# EAGLE board MagicQCtrlPadEncoderPCB v12 (EAGLE 9.7.0)
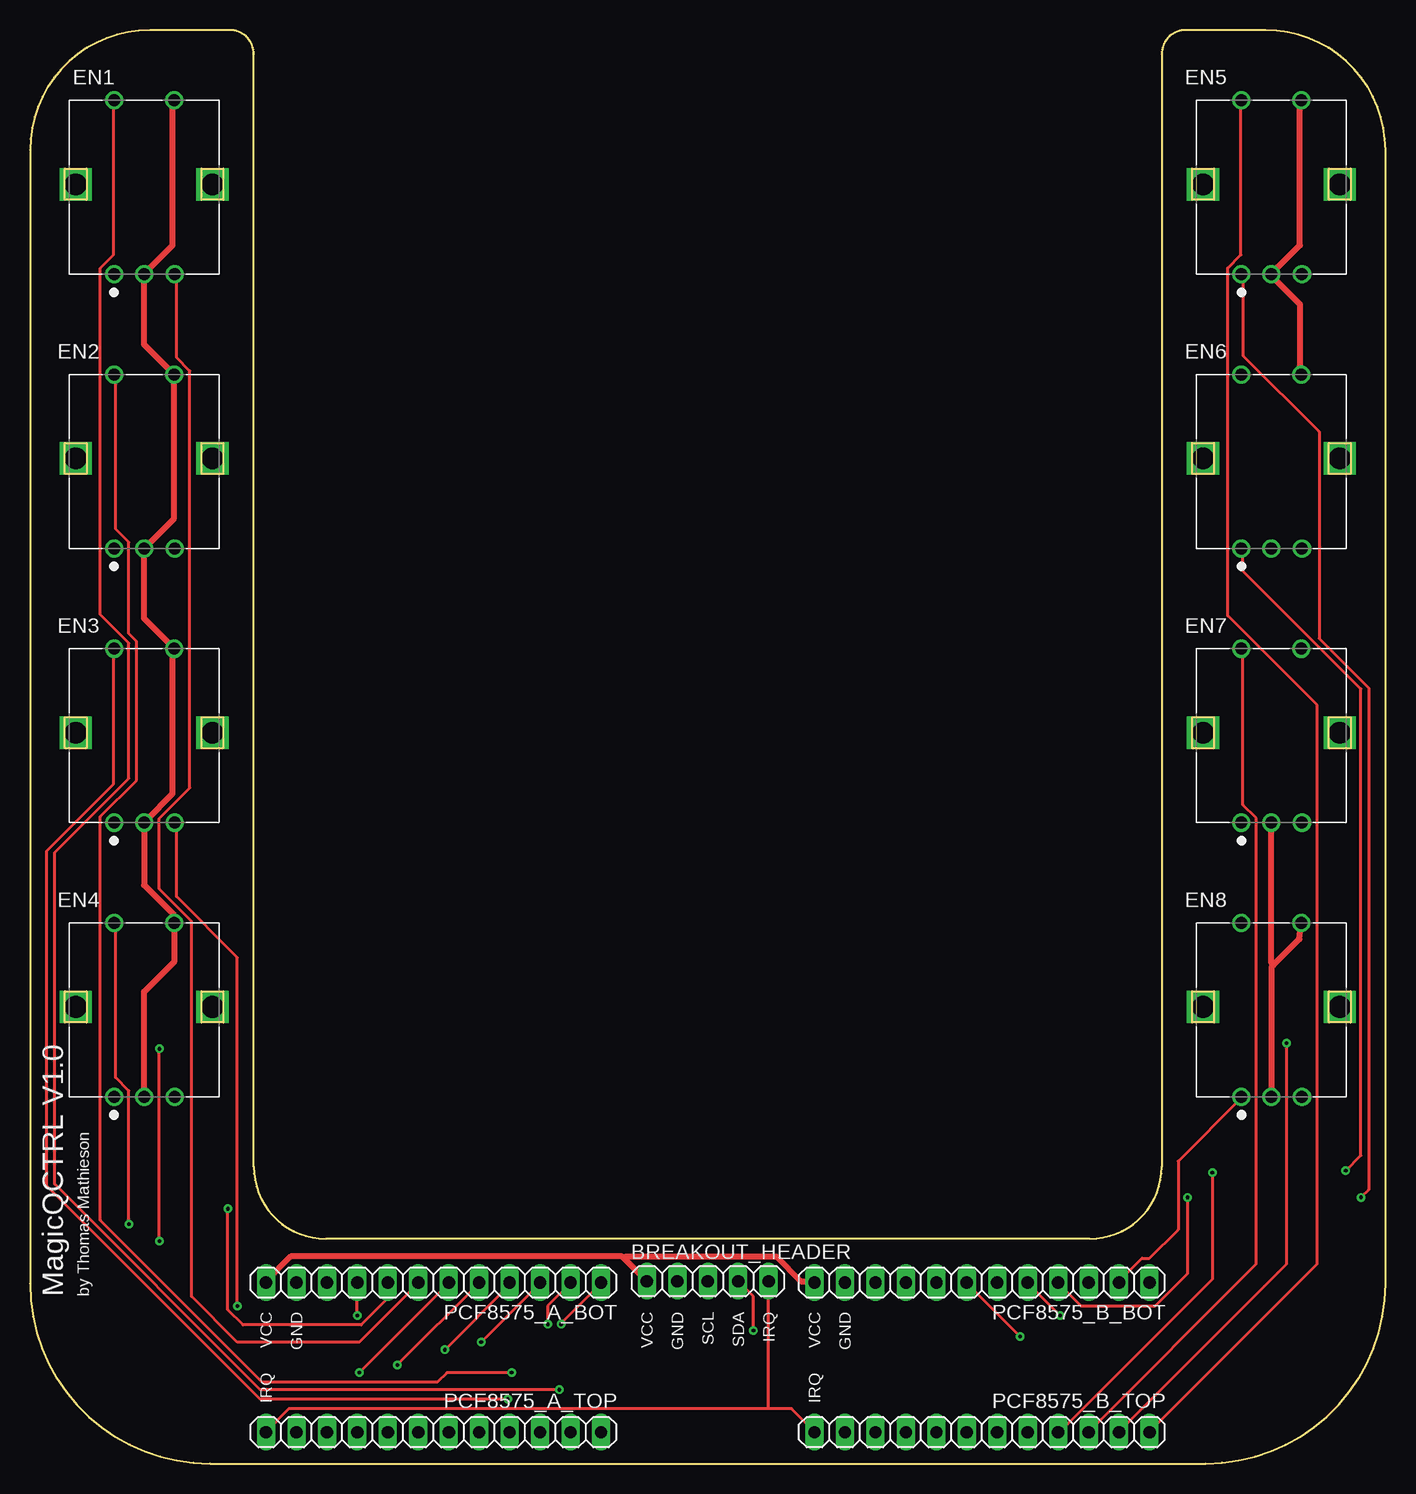
[diagram p0: board, top side]
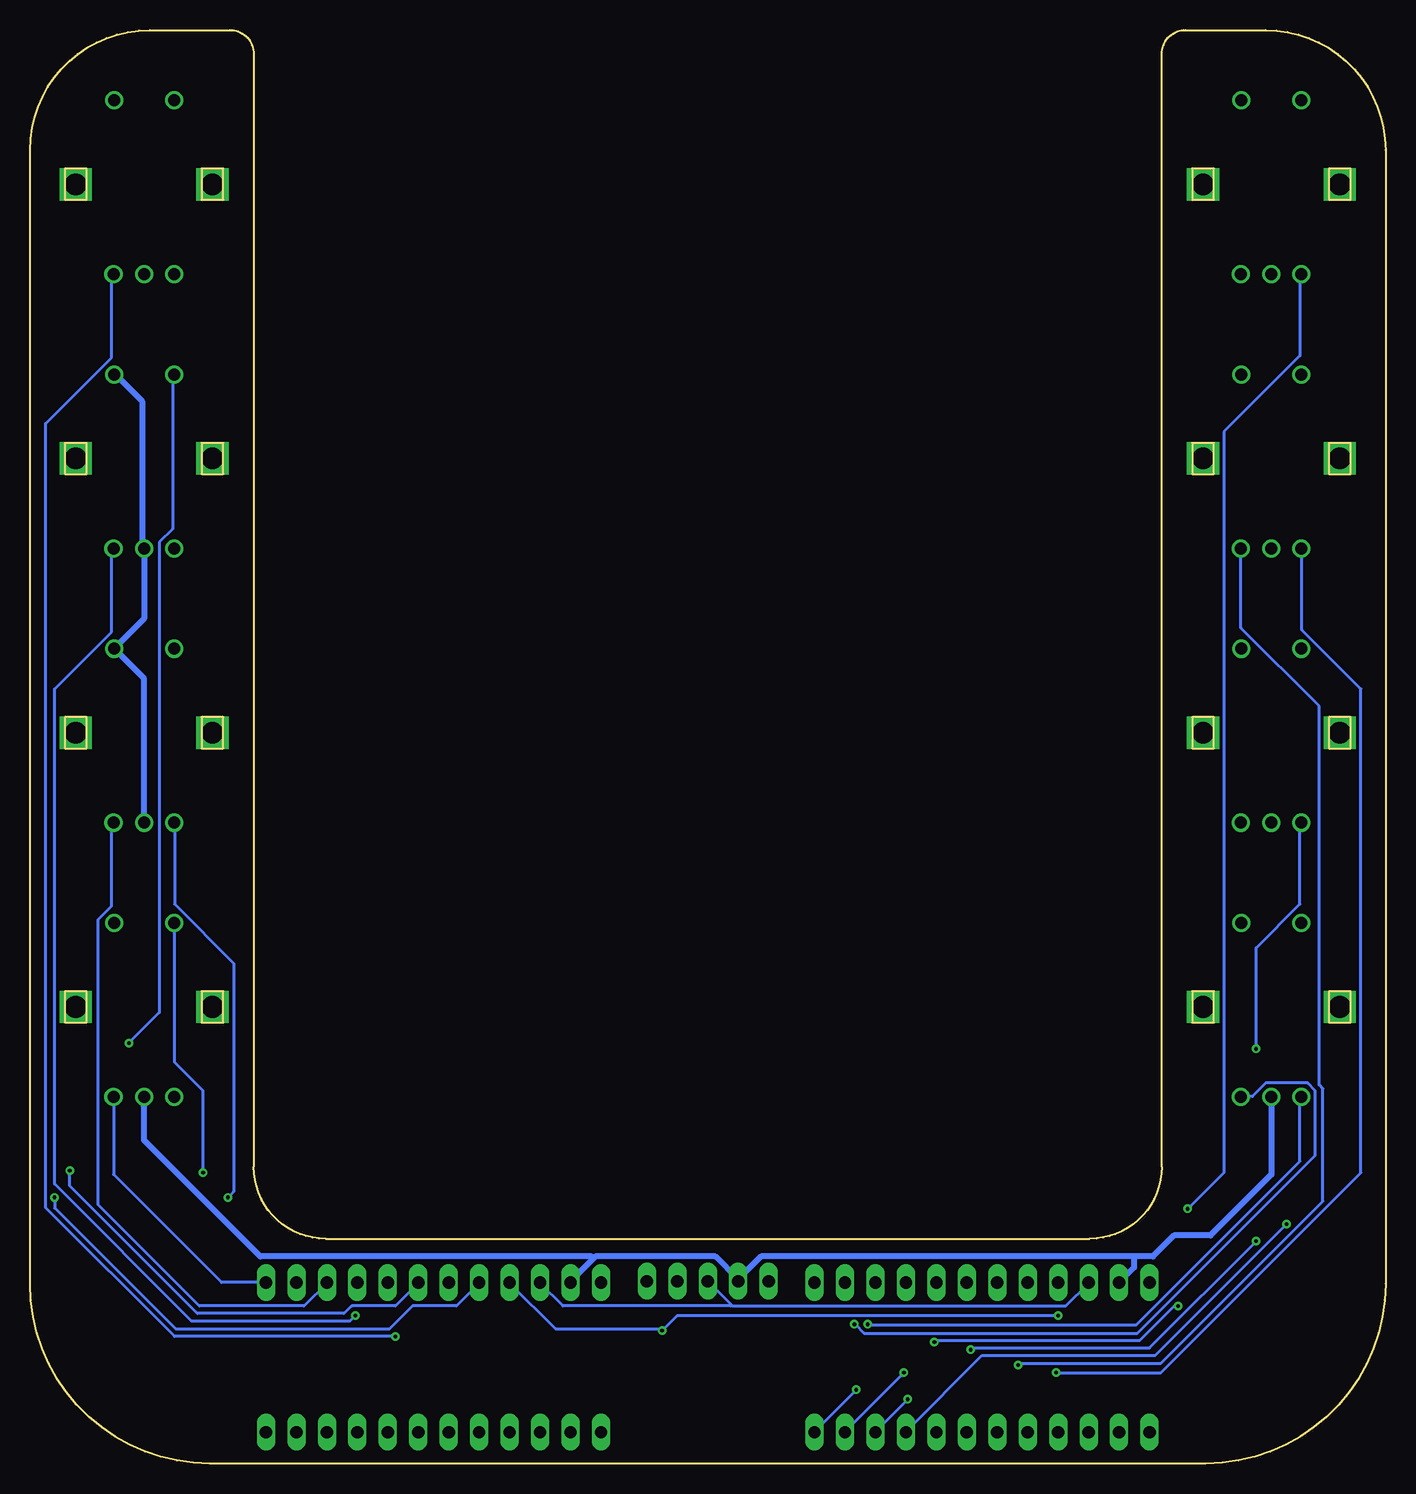
[diagram p1: board, bottom side, seen from below]

Size 113 x 119.5 mm. Coordinates in mm from the lower left corner, seen from the top.
Outline: 96.89,36.76 96.89,39.36 98.69,39.36 98.69,36.76 96.89,36.76
Outline: 96.89,82.48 96.89,85.08 98.69,85.08 98.69,82.48 96.89,82.48
Outline: 108.29,59.62 108.29,62.22 110.09,62.22 110.09,59.62 108.29,59.62
Outline: 96.89,59.62 96.89,62.22 98.69,62.22 98.69,59.62 96.89,59.62
Outline: 108.29,36.76 108.29,39.36 110.09,39.36 110.09,36.76 108.29,36.76
Outline: 108.29,82.48 108.29,85.08 110.09,85.08 110.09,82.48 108.29,82.48
Outline: 96.89,105.34 96.89,107.94 98.69,107.94 98.69,105.34 96.89,105.34
Outline: 108.29,105.34 108.29,107.94 110.09,107.94 110.09,105.34 108.29,105.34
Outline: 2.91,36.76 2.91,39.36 4.71,39.36 4.71,36.76 2.91,36.76
Outline: 14.31,36.76 14.31,39.36 16.11,39.36 16.11,36.76 14.31,36.76
Outline: 2.91,59.62 2.91,62.22 4.71,62.22 4.71,59.62 2.91,59.62
Outline: 14.31,59.62 14.31,62.22 16.11,62.22 16.11,59.62 14.31,59.62
Outline: 2.91,82.48 2.91,85.08 4.71,85.08 4.71,82.48 2.91,82.48
Outline: 14.31,82.48 14.31,85.08 16.11,85.08 16.11,82.48 14.31,82.48
Outline: 14.31,105.34 14.31,107.94 16.11,107.94 16.11,105.34 14.31,105.34
Outline: 2.91,105.34 2.91,107.94 4.71,107.94 4.71,105.34 2.91,105.34
Outline: 18.66,24.74 18.66,117.5 arc90 16.66,119.5 10,119.5 arc90 0,109.5 0,15 arc90 15,0 98,0 arc90 113,15 113,109.5 arc90 103,119.5 96.34,119.5 arc90 94.34,117.5 94.34,24.74 arc-90 88.34,18.74 24.66,18.74 arc-90 18.66,24.74
Copper layers (1*16): Top / Bottom
Stack-up Default Layer Stack: Top Silk Screen Epoxy Ink / Top Solder Mask SR:Green 0.0254mm Dk 4 / Top Surface Finish Lead-Tin 0.02mm / Top User Defined 0.035mm / Dielectric-1 User Defined 1.5mm / Bottom User Defined 0.035mm / Bottom Surface Finish Lead-Tin 0.02mm / Bottom Solder Mask SR:Green 0.0254mm Dk 4 / Bottom Silk Screen Epoxy Ink
Design rules "default *": minimum track width 10mil, minimum drill 12mil, track to track 10mil, track to pad 10mil, pad to pad 6mil, via to via 10mil, smd to smd 6mil, copper to edge 40mil, drill to drill 20mil, minimum pad ring 10mil, minimum via ring 8mil, stop-mask expansion 4mil, vias tented up to drill 0mil, thermal gap 10mil
Net classes: 1 power: width 0.508 mm

## Footprints (pad centres in the part's own frame; a part is rotated, then mirrored left to right if it is on the bottom)
1X05 = drill 1.016 long: 1 -5.08,0; 2 -2.54,0; 3 0,0; 4 2.54,0; 5 5.08,0
PEC11R-4215K-S0024 = drill 1: 1 -2.5,7; 2 2.5,7; A -2.5,-7.5; B 2.55,-7.5; C 0,-7.5 | drill 1.8 square: M1 -5.7,0; M2 5.7,0
1X12 = drill 1.016 long: 1 -13.97,0; 2 -11.43,0; 3 -8.89,0; 4 -6.35,0; 5 -3.81,0; 6 -1.27,0; 7 1.27,0; 8 3.81,0; 9 6.35,0; 10 8.89,0; 11 11.43,0; 12 13.97,0

## Placement (x,y rotation side)
BREAKOUT_HEADER  PINHD-1X5  [1X05]  56.5,15.2 0 top
EN1  PEC11R-4215K-S0024  [PEC11R-4215K-S0024]  9.51,106.64 0 top
EN2  PEC11R-4215K-S0024  [PEC11R-4215K-S0024]  9.51,83.78 0 top
EN3  PEC11R-4215K-S0024  [PEC11R-4215K-S0024]  9.51,60.92 0 top
EN4  PEC11R-4215K-S0024  [PEC11R-4215K-S0024]  9.51,38.06 0 top
EN5  PEC11R-4215K-S0024  [PEC11R-4215K-S0024]  103.49,106.64 0 top
EN6  PEC11R-4215K-S0024  [PEC11R-4215K-S0024]  103.49,83.78 0 top
EN7  PEC11R-4215K-S0024  [PEC11R-4215K-S0024]  103.49,60.92 0 top
EN8  PEC11R-4215K-S0024  [PEC11R-4215K-S0024]  103.49,38.06 0 top
PCF8575_A_BOT  PINHD-1X12  [1X12]  33.64,15.08 180 top
PCF8575_A_TOP  PINHD-1X12  [1X12]  33.64,2.62 180 top
PCF8575_B_BOT  PINHD-1X12  [1X12]  79.36,15.08 180 top
PCF8575_B_TOP  PINHD-1X12  [1X12]  79.36,2.62 180 top

## Library data of the parts
BREAKOUT_HEADER PCF8575_A_BOT PCF8575_A_TOP PCF8575_B_BOT PCF8575_B_TOP = Connector; CATEGORY: CONNECTOR; SUB-CATEGORY: PIN-HEADER
EN1-EN8 = Encoders; CREATED_BY: PCBLayout.com; DIGIKEY_PARTNO: PEC11R-4215K-S0024-ND; MANUFACTURER: Bourns Inc.; MPN: PEC11R-4215K-S0024

## Nets
A0_A: PCF8575_A_TOP.11
A0_B: PCF8575_B_TOP.11
A1_A: PCF8575_A_TOP.10
A1_B: PCF8575_B_TOP.10
A2_A: PCF8575_A_TOP.9
A2_B: PCF8575_B_TOP.9
GND [power]: BREAKOUT_HEADER.2 EN1.2 EN1.C EN2.2 EN2.C EN3.2 EN3.C EN4.2 EN4.C EN5.2 EN5.C EN6.2 EN6.C EN7.2 EN7.C EN8.2 EN8.C PCF8575_A_BOT.11 PCF8575_B_BOT.11
IRQ: BREAKOUT_HEADER.5 PCF8575_A_TOP.12 PCF8575_B_TOP.12
P0_A: EN1.A PCF8575_A_BOT.8
P0_B: EN5.A PCF8575_B_BOT.8
P1_A: EN1.B PCF8575_A_BOT.7
P1_B: EN5.B PCF8575_B_BOT.7
P2_A: EN2.A PCF8575_A_BOT.6
P2_B: EN6.A PCF8575_B_BOT.6
P3_A: EN2.B PCF8575_A_BOT.5
P3_B: EN6.B PCF8575_B_BOT.5
P4_A: EN3.A PCF8575_A_BOT.4
P4_B: EN7.A PCF8575_B_BOT.4
P5_A: EN3.B PCF8575_A_BOT.3
P5_B: EN7.B PCF8575_B_BOT.3
P6_A: EN4.A PCF8575_A_BOT.2
P6_B: EN8.A PCF8575_B_BOT.2
P7_A: EN4.B PCF8575_A_BOT.1
P7_B: EN8.B PCF8575_B_BOT.1
P8_A: EN1.1 PCF8575_A_TOP.1
P8_B: EN5.1 PCF8575_B_TOP.1
P9_A: EN2.1 PCF8575_A_TOP.2
P9_B: EN6.1 PCF8575_B_TOP.2
P10_A: EN3.1 PCF8575_A_TOP.3
P10_B: EN7.1 PCF8575_B_TOP.3
P11_A: EN4.1 PCF8575_A_TOP.4
P11_B: EN8.1 PCF8575_B_TOP.4
P12_A: PCF8575_A_TOP.5
P12_B: PCF8575_B_TOP.5
P13_A: PCF8575_A_TOP.6
P13_B: PCF8575_B_TOP.6
P14_A: PCF8575_A_TOP.7
P14_B: PCF8575_B_TOP.7
P15_A: PCF8575_A_TOP.8
P15_B: PCF8575_B_TOP.8
SCL: BREAKOUT_HEADER.3 PCF8575_A_BOT.10 PCF8575_B_BOT.10
SDA: BREAKOUT_HEADER.4 PCF8575_A_BOT.9 PCF8575_B_BOT.9
VCC [power]: BREAKOUT_HEADER.1 PCF8575_A_BOT.12 PCF8575_B_BOT.12

## Tracks (layer width: path | path; a pad name or v marks a point on that pad's centre or on a via)
GND
  Top 0.508: EN8.C 103.49,41.39 103.65,41.55 | 103.65,41.55 105.82,43.73 EN8.2 | EN7.C 103.49,41.71 103.65,41.55 | EN6.2 105.87,90.92 105.87,96.64 103.49,99.02 EN5.C 103.65,99.34 105.87,101.56 105.87,113.62 EN5.2 | EN1.2 11.89,113.62 11.89,101.56 9.67,99.34 EN1.C 9.51,93.28 EN2.2 12.01,78.78 EN2.C 9.51,70.44 11.89,68.06 EN3.2 11.89,67.75 11.89,55.84 9.67,53.62 EN3.C 9.51,48.22 12.01,45.72 EN4.2 12.05,45.02 12.05,41.87 9.51,39.33 EN4.C
  Bottom 0.508: EN6.2 105.87,90.77 103.65,88.54 103.65,76.48 EN6.C 103.49,70.42 EN7.2 103.49,65.42 EN7.C | 66.03,17.11 65.87,17.26 55.87,17.26 53.96,15.36 BREAKOUT_HEADER.2 53.8,15.52 52.05,17.26 20.94,17.26 | 66.03,17.11 67.93,15.2 PCF8575_B_BOT.11 | EN4.C 9.51,24.09 14.59,19.01 17.63,19.01 19.38,17.26 20.94,17.26 | EN8.C 103.49,26.95 93.81,17.26 66.18,17.26 66.03,17.11 | PCF8575_A_BOT.11 20.94,16.35 20.94,17.26
IRQ
  Top 0.254: 61.58,4.56 63.48,4.56 65.39,2.66 PCF8575_B_TOP.12 | 61.58,4.56 21.58,4.56 19.67,2.66 PCF8575_A_TOP.12 | 61.58,4.56 BREAKOUT_HEADER.5
P0_A  (via drill 0.3)
  Top 0.254: v16.49,21.23 16.49,12.82 17.77,11.55 27.61,11.55 29.83,13.77 PCF8575_A_BOT.8
  Bottom 0.254: v16.49,21.23 13.48,24.25 13.48,86 7.13,92.35 7.13,99.02 EN1.A
P0_B  (via drill 0.3)
  Top 0.254: v110.95,22.18 111.59,22.82 111.59,64.65 107.46,68.78 107.46,86 101.11,92.35 101.11,99.02 EN5.A
  Bottom 0.254: PCF8575_B_BOT.8 75.55,15.04 77.45,13.14 81.11,13.14 83.01,11.23 100.88,11.23 110.95,21.31 v110.95,22.18
P1_A
  Top 0.254: EN1.B 12.21,99.02 12.21,92.19 13.32,91.08 13.32,56.32 10.78,53.78 10.78,47.9 13.48,45.2 13.48,13.93 17.29,10.12 27.45,10.12 32.37,15.04 PCF8575_A_BOT.7
P1_B  (via drill 0.3)
  Top 0.254: v82.53,10.6 78.09,15.04 PCF8575_B_BOT.7
  Bottom 0.254: EN5.B 106.19,99.02 106.19,92.19 111.69,86.69 111.69,21.33 100.96,10.6 v82.53,10.6
P2_A  (via drill 0.3)
  Top 0.254: v27.45,7.58 34.91,15.04 PCF8575_A_BOT.6
  Bottom 0.254: v27.45,7.58 18.72,7.58 2.05,24.25 2.05,64.57 6.97,69.49 6.97,76.16 EN2.A
P2_B  (via drill 0.3)
  Top 0.254: v109.68,24.41 110.95,25.68 110.95,64.56 101.11,74.41 101.11,76.16 EN6.A
  Bottom 0.254: v109.68,24.41 109.68,23.14 99.05,12.5 86.82,12.5 86.19,13.14 82.53,13.14 80.63,15.04 PCF8575_B_BOT.6
P3_A  (via drill 0.3)
  Top 0.254: v30.62,8.21 37.45,15.04 PCF8575_A_BOT.5
  Bottom 0.254: v30.62,8.21 30.46,8.37 18.72,8.37 5.22,21.87 5.22,31.23 5.54,31.55 5.54,63.14 12.05,69.65 12.05,76.16 EN2.B
P3_B  (via drill 0.3)
  Top 0.254: v85.87,12.34 83.17,15.04 PCF8575_B_BOT.5
  Bottom 0.254: v85.87,12.34 86.34,11.87 99.52,11.87 110.95,23.3 110.95,64.56 106.19,69.33 106.19,76.13 EN6.B
P4_A  (via drill 0.3)
  Top 0.254: v10.78,18.53 v10.78,34.57 | v34.59,9.48 39.99,14.88 PCF8575_A_BOT.4
  Bottom 0.254: v10.78,34.57 10.78,42.98 7.13,46.63 7.13,53.3 EN3.A | v10.78,18.53 19.67,9.64 34.43,9.64 v34.59,9.48
P4_B  (via drill 0.3)
  Top 0.254: v96.5,22.18 96.5,15.84 93.81,13.14 87.61,13.14 85.71,15.04 PCF8575_B_BOT.4
  Bottom 0.254: v96.5,22.18 96.03,22.66 96.03,41.7 100.95,46.62 100.95,53.38 EN7.A
P5_A  (via drill 0.3)
  Top 0.254: v17.29,13.14 17.29,42.19 12.21,47.27 12.21,53.3 EN3.B | v37.61,10.12 42.53,15.04 PCF8575_A_BOT.3
  Bottom 0.254: v17.29,13.14 17.61,13.14 20.46,10.28 37.45,10.28 v37.61,10.12
P5_B
  Bottom 0.254: PCF8575_B_BOT.3 88.25,15.04 90.16,13.14 98.89,13.14 107.3,21.55 107.3,45.35 106.19,46.47 106.19,53.27 EN7.B
P6_A  (via drill 0.3)
  Top 0.254: PCF8575_A_BOT.2 45.07,15.04 43.16,13.14 v43.16,11.61
  Bottom 0.254: EN4.A 7.13,30.44 7.13,25.2 20.78,11.55 43.01,11.55 43.06,11.61 v43.16,11.61
P6_B
  Top 0.254: EN8.A 100.99,30.48 95.71,25.2 95.71,19.49 93.33,17.11 92.69,17.11 90.79,15.2 PCF8575_B_BOT.2
P7_A  (via drill 0.3)
  Top 0.254: PCF8575_A_BOT.1 47.61,15.04 44.28,11.71 v44.28,11.61
  Bottom 0.254: EN4.B 12.05,30.6 11.1,30.6 9.99,31.71 6.49,31.71 5.86,31.07 5.86,25.68 20.67,10.87 43.47,10.87 44.21,11.61 v44.28,11.61
P7_B
  Bottom 0.254: PCF8575_B_BOT.1 97.02,15.08 106.03,24.09 106.03,30.44 EN8.B
P8_A  (via drill 0.3)
  Top 0.254: v44.12,6.15 19.19,6.15 2.05,23.3 2.05,50.92 8.24,57.11 8.24,68.38 5.86,70.76 5.86,99.66 6.97,100.77 6.97,113.62 EN1.1
  Bottom 0.254: v44.12,6.15 47.61,2.66 PCF8575_A_TOP.1
P8_B
  Top 0.254: EN5.1 100.95,113.62 100.95,100.77 99.84,99.66 99.84,70.68 107.3,63.22 107.3,16.63 93.33,2.66 PCF8575_B_TOP.1
P9_A  (via drill 0.3)
  Top 0.254: v40.15,7.58 34.75,7.58 33.96,6.79 19.35,6.79 5.86,20.28 5.86,53.94 8.88,56.95 8.88,68.54 8.24,69.17 8.24,76.8 7.13,77.91 7.13,90.77 EN2.1
  Bottom 0.254: v40.15,7.58 45.07,2.66 PCF8575_A_TOP.2
P9_B  (via drill 0.3)
  Top 0.254: v104.76,35.04 104.76,16.63 90.79,2.66 PCF8575_B_TOP.2
  Bottom 0.254: v104.76,35.04 102.22,37.58 102.22,76.8 101.11,77.91 101.11,90.77 EN6.1
P10_A  (via drill 0.3)
  Top 0.254: v39.83,5.36 19.19,5.36 1.41,23.14 1.41,51.08 6.97,56.63 6.97,67.91 EN3.1
  Bottom 0.254: v39.83,5.36 42.53,2.66 PCF8575_A_TOP.3
P10_B
  Top 0.254: PCF8575_B_TOP.3 88.25,2.66 102.22,16.63 102.22,53.8 101.11,54.91 101.11,67.8 EN7.1
P11_A  (via drill 0.3)
  Top 0.254: v8.24,19.96 8.24,31.07 7.13,32.19 7.13,45.05 EN4.1
  Bottom 0.254: v8.24,19.96 19.19,9.01 33.64,9.01 39.99,2.66 PCF8575_A_TOP.4
P11_B  (via drill 0.3)
  Top 0.254: v98.57,24.25 98.57,15.36 85.83,2.62 PCF8575_B_TOP.4
  Bottom 0.254: v98.57,24.25 98.57,31.07 100.95,33.46 100.95,45.05 EN8.1
SCL
  Bottom 0.254: BREAKOUT_HEADER.3 54.52,13.22 | 54.52,13.22 54.44,13.14 26.66,13.14 24.75,15.04 PCF8575_A_BOT.10 | PCF8575_B_BOT.10 70.47,15.04 68.56,13.14 54.59,13.14 54.52,13.22
SDA  (via drill 0.3)
  Top 0.254: v27.29,12.34 PCF8575_A_BOT.9 | BREAKOUT_HEADER.4 60.31,13.93 v60.31,11.07
  Bottom 0.254: v27.29,12.34 59.04,12.34 v60.31,11.07 60.47,11.23 69.2,11.23 73.01,15.04 PCF8575_B_BOT.9
VCC
  Top 0.508: BREAKOUT_HEADER.1 49.52,17.11 | 49.52,17.11 49.36,17.26 21.73,17.26 19.67,15.2 PCF8575_A_BOT.12 | PCF8575_B_BOT.12 65.39,15.2 64.28,15.2 62.22,17.26 49.67,17.26 49.52,17.11

## Text on the board
tNames: MagicQCTRL V1.0 | by Thomas Mathieson | VCC | GND | VCC | GND | SCL | SDA | IRQ | VCC | GND | IRQ | IRQ